# EAGLE board yuvarani soil moisture sensoring (EAGLE 9.7.0)

Size 229.3 x 175.08 mm. Coordinates in mm from the lower left corner, seen from the top.
Outline: 0,0 229.3,0 229.3,175.08 0,175.08 0,0
Copper layers (1*16): Top 0.035mm / dielectric 1.5mm / Bottom 0.035mm
Design rules "default": minimum track width 6mil, minimum drill 0.35mm, track to track 6mil, track to pad 6mil, pad to pad 6mil, via to via 6mil, smd to smd 6mil, copper to edge 40mil, drill to drill 6mil, minimum pad ring 10mil, minimum via ring 8mil, stop-mask expansion 4mil, vias tented up to drill 0mil, thermal gap 10mil

## Footprints (pad centres in the part's own frame; a part is rotated, then mirrored left to right if it is on the bottom)
BATTERY-GENERIC = drill 1.118 pad 3.15 octagon: + 2.54,0; - -2.54,0
LEDRD254W60D565H860B_B = drill 0.981 pad 1.581: 1 -1.27,0; 2 1.27,0
LU-5-R = drill 0.8: 1 -6.35,-3.81; 5 3.81,-3.81; 6 6.35,-3.81; 7 6.35,3.81; 8 3.81,3.81; 12 -6.35,3.81
MOTOR = drill 1.118 pad 3.15 octagon: + 2.54,0; - -2.54,0
PIEZO = drill 1 pad 1.6: 1 -3.5,0; 2 3.5,0
RESAD1016W63L850D250B = drill 0.83 pad 1.43: 1 -5.08,0; 2 5.08,0
HA-06-SM065 = drill 1 pad 1.676: 1 -2.54,-2.54; 2 0,2.54; 3 2.54,-2.54
TO92 = drill 0.813 octagon: 1 -1.27,0; 2 0,1.905; 3 1.27,0
JHD-162A = drill 1.016 long: 1 -19.05,0; 2 -16.51,0; 3 -13.97,0; 4 -11.43,0; 5 -8.89,0; 6 -6.35,0; 7 -3.81,0; 8 -1.27,0; 9 1.27,0; 10 3.81,0; 11 6.35,0; 12 8.89,0; 13 11.43,0; 14 13.97,0; 15 16.51,0; 16 19.05,0
ARDUINO-UNO-R3-SHIELD = drill 1.016 pad 1.88: 3.3V 24.13,-2.54; 5V 24.13,0; A0 24.13,12.7; A1 24.13,15.24; A2 24.13,17.78; A3 24.13,20.32; A4 24.13,22.86; A5 24.13,25.4; AREF -24.13,-13.97; D2 -24.13,20.32; D3 -24.13,17.78; D4 -24.13,15.24; D5 -24.13,12.7; D6 -24.13,10.16; D7 -24.13,7.62; D8 -24.13,3.81; D9 -24.13,1.27; D10 -24.13,-1.27; D11 -24.13,-3.81; D12 -24.13,-6.35; D13 -24.13,-8.89; GND@0 24.13,2.54; GND@1 24.13,5.08; GND@2 -24.13,-11.43; IOREF 24.13,-7.62; NC 24.13,-10.16; RES 24.13,-5.08; RX -24.13,25.4; SCL -24.13,-19.05; SDA -24.13,-16.51; TX -24.13,22.86; VIN 24.13,7.62
TSOP48 = drill 0.8: 1 -2.54,0; 2 0,0; 3 2.54,0

## Placement (x,y rotation side)
BAT1  9V  [BATTERY-GENERIC]  214.11,94.04 270 top
DGSM_MODULE  BLUE  [LEDRD254W60D565H860B_B]  87.06,61.9 180 top
K1  RELAY-SPDT_LU-5-R  [LU-5-R]  146.17,96.02 180 top
M2  MOTOR_HDR  [MOTOR]  152.66,112.01 0 top
PIEZO1  PIEZO  [PIEZO]  217.57,161.5 0 top
R1  1k  [RESAD1016W63L850D250B]  88.33,46.66 90 top
R2  220  [RESAD1016W63L850D250B]  60.39,66.98 90 top
R3  1k  [RESAD1016W63L850D250B]  146.75,49.2 90 top
RPOT1  250k  [HA-06-SM065]  7.05,44.12 0 top
T1  NPN  [TO92]  146.75,59.36 0 top
U1  TMP36GT9Z_TO92  [TO92]  55.31,54.28 0 top
U2  LCD-16X2JHD-162A  [JHD-162A]  43.88,36.63 0 top
UARD  ARDUINO-UNO-R3-SHIELD  [ARDUINO-UNO-R3-SHIELD]  83.21,121.65 180 top
UIR_SENSOR  IR-RECEIVERTSOP48  [TSOP48]  156.33,162.54 0 top

## Library data of the parts
BAT1 K1 M2 PIEZO1 R1-R3 RPOT1 U1 U2 UARD UIR_SENSOR = Tinkercad
DGSM_MODULE = Tinkercad; CATEGORY: Opto-Electronic; SUB-CATEGORY: LED; VALUE: LED_BLUE
T1 = Tinkercad; CATEGORY: Transistor; SUB-CATEGORY: BJT; TYPE: NPN

## Nets
BAT1+: BAT1.+ K1.12
BAT1-: BAT1.- M2.-
DGSM_MODULE_A: DGSM_MODULE.1 R1.2
M2_+: K1.6 M2.+
T1_B: R3.2 T1.2
T1_C: K1.5 T1.1
U2_LED+: R2.1 U2.15
U2_VO: RPOT1.2 U2.3
UARD_5V: K1.8 PIEZO1.2 R2.2 RPOT1.3 U1.3 U2.2 UARD.5V UIR_SENSOR.3
UARD_A1: PIEZO1.1 UARD.A1 UIR_SENSOR.1
UARD_A4: U1.2 UARD.A4
UARD_D2: R3.1 UARD.D2
UARD_D3: U2.14 UARD.D3
UARD_D4: U2.13 UARD.D4
UARD_D5: U2.12 UARD.D5
UARD_D6: U2.11 UARD.D6
UARD_D8: R1.1 UARD.D8
UARD_D11: U2.6 UARD.D11
UARD_D12: U2.4 UARD.D12
UARD_GND: DGSM_MODULE.2 RPOT1.1 T1.3 U1.1 U2.1 U2.5 U2.16 UARD.GND@0 UARD.GND@1 UARD.GND@2 UIR_SENSOR.2

## Tracks (layer width: path | path; a pad name or v marks a point on that pad's centre or on a via)
BAT1+  (1 unrouted)
BAT1-  (1 unrouted)
DGSM_MODULE_A  (1 unrouted)
M2_+  (1 unrouted)
T1_B  (1 unrouted)
T1_C  (1 unrouted)
U2_LED+  (1 unrouted)
U2_VO  (1 unrouted)
UARD_5V  (7 unrouted)
UARD_A1  (2 unrouted)
UARD_A4  (1 unrouted)
UARD_D2  (1 unrouted)
UARD_D3  (1 unrouted)
UARD_D4  (1 unrouted)
UARD_D5  (1 unrouted)
UARD_D6  (1 unrouted)
UARD_D8  (1 unrouted)
UARD_D11  (1 unrouted)
UARD_D12  (1 unrouted)
UARD_GND  (10 unrouted)